# Altium PCB msp430_v4.2_name.PcbDoc (part 2 of 2)
Units mil, origin at the board's own origin, x right, y up, seen from the top; angles counter-clockwise.
Board outline 6102.36 x 4921.26 mil, 2 copper layers (Top Layer, Bottom Layer); 157 components, 141 nets, 553 pads, 72 vias.
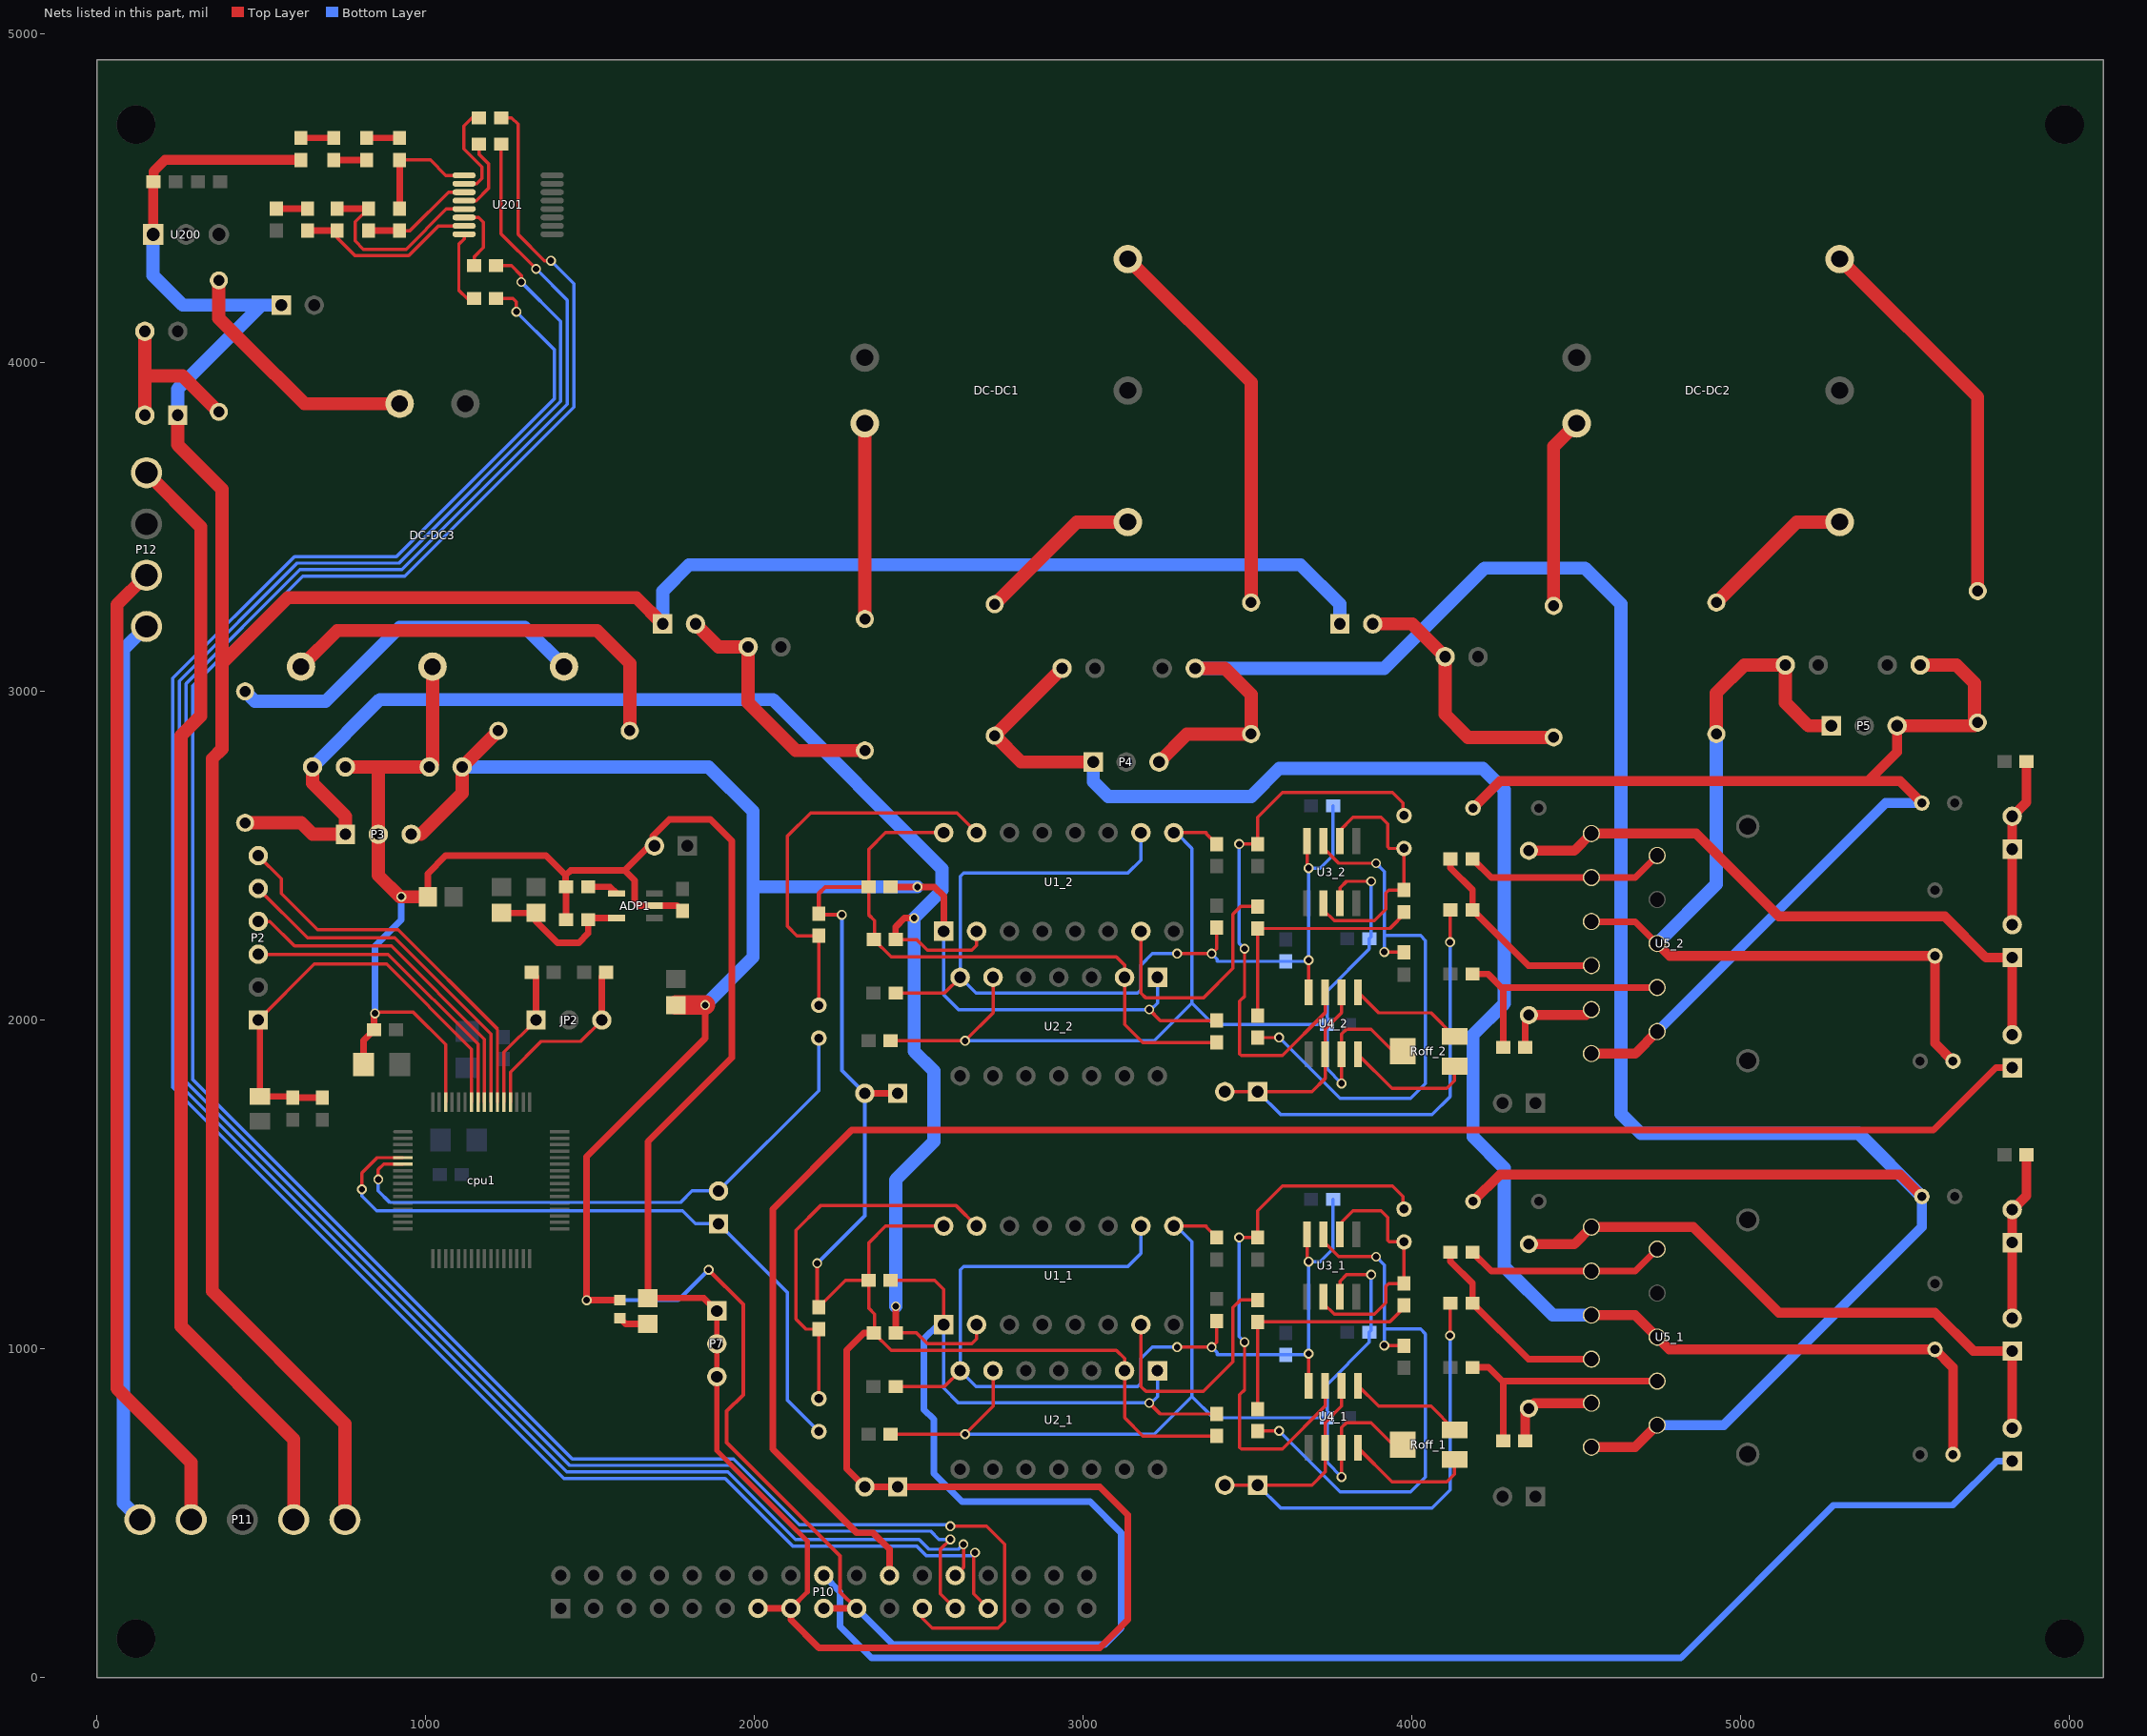
[diagram p2: the nets of this part, all layers, seen from the top]

## Via types
v1: diameter 30, hole 20, Top Layer to Bottom Layer, 71 vias
v2: diameter 50, hole 30, Top Layer to Bottom Layer, 1 vias

## Nets (pads, with @x,y where several pads share a name; then routed paths per layer and width w, separated by ;. In a path a pad name is that pad's centre, name@x,y a point inside that pad or via, vN(x,y) a via of type N, cw(c..) or ccw(c..) an arc to the next point about the centre after c; other vN are vias at no path point) (continued)
GNDB: ADP1.2 C1.2 C2.2 C3.2 C12.1 C13.1 C16_1.2 C16_2.2 cpu1.62 CT3_1.2 CT3_2.2 CT4_1.1 CT4_2.1 DC-DC3.4 DS2.2 P1_1.1 P1_1.2 P1_2.1 P1_2.2 P2.2@1695,2530 P3.2 P7.1 P7.2 P7.3 P10.13 P10.15 P_C8.2 P_C9.1 R5.2 Rf_1.1 Rf_2.1 U1_1.16 U1_2.16 U2_1.2 U2_2.2 | length 14736.5
  Top Layer w10: v1@841.54,2023.46 961.54,2023.46 1059.92,1925.08 cpu1.62@1059.92,1750.55 ; Rf_1.1@2195,1126.54 2276.54,1208.07 CT3_1.2@2346.54,1208.07 ; CT4_1.1@2362.22,1048.07 2415.29,995 3100,995 3125,970 U2_1.2@3125,933.07 3125,790 3180.39,734.61 C16_1.2@3405,734.61 ; CT4_2.1@2362.22,2245 2415.29,2191.93 3100,2191.93 3125,2166.93 U2_2.2@3125,2130 3125,1986.93 3180.39,1931.54 C16_2.2@3405,1931.54 ; CT4_1.1@2365,1050.85 2365,1105 2346.54,1123.46 CT3_1.2@2346.54,1208.07 ; CT4_2.1@2365,2247.78 2365,2301.93 2346.54,2320.39 CT3_2.2@2346.54,2405 2346.54,2518.46 2398.07,2570 U1_2.16@2575,2570 ; U1_1.16@2575,1373.07 2398.07,1373.07 2346.54,1321.54 CT3_1.2@2346.54,1208.07
  Top Layer w12: Rf_1.1@2190,1131.54 v1(2190,1260) ; Rf_2.1@2195,2323.46 2195,2385 2215,2405 CT3_2.2@2346.54,2405 ; Rf_2.1@2198.46,2320 v1(2265,2320)
  Top Layer w15: P7.1@1885,1115 P7.2@1885,1015 P7.3@1885,915 1885,690 2160,415 2160,260 P10.15@2110,210
  Top Layer w20: C12.1@809.88,1865 809.88,1938.35 C13.1@841.54,1970 v1@841.54,2023.46 ; R5.2@1005.63,2375 1005.63,2445.63 1060,2500 1365.2,2500 1425,2440.2 ; C3.2@1425,2406.73 1425,2440.2 ; C2.2@1426.54,2305.2 C3.2@1426.54,2405.2 ; C1.2@1764.13,2347.6 ADP1.2@1695,2347.6 1647.6,2347.6 1635,2360.2 1635,2425.2 1605,2455.2 ; P7.1@1885,1115 1845.63,1154.37 DS2.2@1675,1154.37 1675,1630 1930,1885 1930,2545 1865,2610 1740,2610 1690,2560 1690,2530 1679.8,2530 1605,2455.2 ; P10.13@2010,210 P10.15@2110,210 2110,175 2195,90 3050,90 3135,175 3135,495 3050,580 P1_1.1@2435,580 P1_1.2@2335,580 2280,635 2280,995.54 2332.53,1048.07 CT4_1.1@2362.22,1048.07 ; P1_2.2@2335,1776.93 P1_2.1@2435,1776.93 ; 1425,2440.2 1440,2455.2 1605,2455.2
  Top Layer w40: P_C9.1@755,2770 855,2770 ; R5.2@1005.63,2375 v1(925,2375) 920,2375 855,2440 P3.2@855,2565 855,2770 ; P_C8.2@1010,2770 855,2770 ; P_C8.2@1020,2780 DC-DC3.4@1020,3075
  Bottom Layer w12: v1(2190,1260) 2335,1405 P1_2.2@2335,1776.93 2265,1846.93 v1(2265,2320)
  Bottom Layer w20: v1(845,2020) 845,2225 925,2305 v1(925,2375)
IN1: R205.1 R208.2 U201.1 | length 363.7
  Top Layer w10: R205.1@920,4616.54 1013.46,4616.54 1060.43,4569.57 U201.1@1116.14,4569.57
  Top Layer w20: R208.2@920,4468.46 R205.1@920,4616.54
IN2: R208.1 R209.2 U201.3 | length 339.5
  Top Layer w10: R208.1@920,4401.54 951.54,4401.54 1068.39,4518.39 U201.3@1116.14,4518.39
  Top Layer w20: R209.2@825,4401.54 R208.1@920,4401.54
IN3: R209.1 R210.2 U201.5 | length 602.1
  Top Layer w10: R209.1@825,4468.46 785,4428.46 785,4370 810,4345 940,4345 1062.2,4467.2 U201.5@1116.14,4467.2
  Top Layer w20: R210.2@730,4468.46 R209.1@825,4468.46
IN4: R210.1 R211.2 U201.7 | length 557.3
  Top Layer w10: R210.1@730,4401.54 730,4380 784,4326 947.87,4326 1037.89,4416.02 U201.7@1116.14,4416.02
  Top Layer w20: R211.2@640,4401.54 R210.1@730,4401.54
IN_+12V: C200.2 FUSE.1 P1.1 P11.5 P_F1.1 P_F3.1 R200.2 U200.1 | length 9002.4
  Top Layer w30: U200.1@170,4390 170,4548.46 C200.2@171.54,4550 171.54,4581.54 206.54,4616.54 R200.2@620,4616.54
  Top Layer w40: P_F3.1@245,3840 245,3750 380,3615 380,3085 ; P11.5@753.62,480 753.62,771.38 350,1175 350,2795 380,2825 380,3085 ; P_F1.1@1720,3205 1640,3285 580,3285 380,3085
  Bottom Layer w40: U200.1@170,4390 170,4265 260,4175 500,4175 ; P_F3.1@245,3840 245,3920 500,4175 ; P1.1@560,4175 500,4175 ; P_F1.1@1720,3205 1720,3305 1800,3385 3660,3385 3780,3265 FUSE.1@3780,3205
LED_HIGH: P10.27 R207.2 | length 6390.1
  Top Layer w10: R207.2@1213.46,4195 1265,4195 1275,4185 v1(1275,4155) ; v1(2670,380) 2665.47,375.47 2665.47,254.53 P10.27@2710,210
  Bottom Layer w10: v1(1275,4155) 1390,4040 1390,3889.85 910.15,3410 600.15,3410 230,3039.85 230,1795 1420,605 1910.15,605 2115.15,400 2491.72,400 2521.72,370 2660,370 v1(2670,380)
LED_LOW: P10.23 R203.2 | length 7300.9
  Top Layer w10: R203.2@1228.46,4745 1260,4745 1280,4725 1280,4390 1360,4310 v1(1380,4310) ; P10.23@2510,210 2510,180 2540,150 2740,150 2760,170 2760,405 2705,460 v1(2595,460)
  Bottom Layer w10: v1(1380,4310) 1450,4240 1450,3865 935,3350 625,3350 290,3015 290,1820 1445,665 1935,665 2135,465 2590,465 v1(2595,460)
LED_MEDIUM: P10.26 R206.2 | length 6344.3
  Top Layer w10: R206.2@1213.46,4295 1260,4295 1290,4265 v1(1290,4245) ; P10.26@2610,310 2635,335 v1(2635,405)
  Bottom Layer w10: v1(1290,4245) 1410,4125 1410,3881.57 918.43,3390 608.43,3390 250,3031.57 250,1803.43 1428.43,625 1918.43,625 2123.43,420 2500,420 2530,390 2620,390 v1(2635,405)
LED_MEDIUMLOW: P10.25 R204.2 | length 6741.4
  Top Layer w10: R204.2@1228.46,4665 1228.46,4391.54 v1(1335,4285) ; v1(2595,420) 2565,390 2565,255 P10.25@2610,210
  Bottom Layer w10: v1(1335,4285) 1430,4190 1430,3873.28 926.72,3370 616.72,3370 270,3023.28 270,1811.72 1436.72,645 1926.72,645 2126.72,445 2535,445 2560,420 v1(2595,420)
LI_12V: P11.4 P12.1 | length 3420.2
  Top Layer w40: P12.1@150,3665 315,3500 315,2925 255,2865 255,1067.72 597.72,725 P11.4@597.72,480
LI_CRG+: P11.2 P12.3 | length 3004
  Top Layer w40: P12.3@150,3353.19 60,3263.19 60,880 285.91,654.09 P11.2@285.91,480
LI_CRG-: P11.1 P12.4 | length 2767
  Bottom Layer w40: P11.1@130,480 80,530 80,3127.28 P12.4@150,3197.28
NetADP1_4: ADP1.4 C3.1 | length 94.9
  Top Layer w20: C3.1@1493.46,2405.2 1559.8,2405.2 ADP1.4@1580,2385
NetADP1_5: ADP1.5 C2.1 R3.2 R4.2 | length 450.8
  Top Layer w20: R3.2@1230,2325.63 R4.2@1335,2325.63 1335,2300 1399.8,2235.2 1465,2235.2 1493.46,2263.66 C2.1@1493.46,2305.2 ; C2.1@1498.46,2310.2 ADP1.5@1580,2310.2
NetC2_singleCH1_1: C2_1.1 R3_1.2 R4_1.1 | length 732.7
  Top Layer w10: R4_1.1@3530,816.54 R3_1.2@3530,1081.54 3931.93,1081.54 C2_1.1@3978.46,1128.07
NetC2_singleCH1_2: C2_1.2 C3_1.1 U3_1.2 U3_1.6 | length 798.4
  Top Layer w10: U3_1.6@3730,1158.58 3730,1137.6 3762.6,1105 3885,1105 3920,1140 3920,1190 3928.46,1198.46 C2_1.2@3975,1198.46 C3_1.1@3975,1325 3930,1325 3925,1330 3925,1400 3905,1420 3820,1420 3780,1380 U3_1.2@3780,1347.56
NetC2_singleCH2_1: C2_2.1 R3_2.2 R4_2.1 | length 732.7
  Top Layer w10: R4_2.1@3530,2013.46 R3_2.2@3530,2278.46 3931.93,2278.46 C2_2.1@3978.46,2325
NetC2_singleCH2_2: C2_2.2 C3_2.1 U3_2.2 U3_2.6 | length 798.4
  Top Layer w10: U3_2.6@3730,2355.51 3730,2334.53 3762.6,2301.93 3885,2301.93 3920,2336.93 3920,2386.93 3928.46,2395.39 C2_2.2@3975,2395.39 C3_2.1@3975,2521.93 3930,2521.93 3925,2526.93 3925,2596.93 3905,2616.93 3820,2616.93 3780,2576.93 U3_2.2@3780,2544.49
NetC3_singleCH1_2: C3_1.2 R6_1.2 U4_1.3 | length 1706.7
  Top Layer w10: v1(3473.46,1338.46) R6_1.2@3530,1338.46 3530,1420 3605,1495 3940,1495 3971.93,1463.07 3971.93,1425 3975,1428.07 C3_1.2@3985,1428.07 ; v1(3490,1020) 3490,875 3475,860 3475,700 3480,695 3605,695 3735,825 U4_1.3@3735,887.56
  Bottom Layer w10: v1(3473.46,1338.46) 3473.46,1036.54 v1(3490,1020)
NetC3_singleCH2_2: C3_2.2 R6_2.2 U4_2.3 | length 1706.7
  Top Layer w10: v1(3473.46,2535.39) R6_2.2@3530,2535.39 3530,2616.93 3605,2691.93 3940,2691.93 3971.93,2660 3971.93,2621.93 3975,2625 C3_2.2@3985,2625 ; v1(3490,2216.93) 3490,2071.93 3475,2056.93 3475,1896.93 3480,1891.93 3605,1891.93 3735,2021.93 U4_2.3@3735,2084.49
  Bottom Layer w10: v1(3473.46,2535.39) 3473.46,2233.46 v1(3490,2216.93)
NetC5_2: C5.2 cpu1.53 JP2.1 | length 421.5
  Top Layer w10: cpu1.53@1237.09,1750.55 1237.09,1902.09 JP2.1@1335,2000
  Top Layer w20: JP2.1@1335,2000 C5.2@1335,2131.54
NetC5_singleCH1_1: C5_1.1 R4_1.2 U3_1.3 | length 1712.9
  Top Layer w10: R4_1.2@3530,749.61 3594.61,749.61 v1(3595,750) ; U3_1.3@3730,1347.56 3730,1326.58 3776.58,1280 v1(3890,1280) ; v1(3915,1010) 3973.46,1010 C5_1.1@3975,1008.46
  Bottom Layer w10: v1(3595,750) 3780,565 3995,565 4040,610 4040,1045 4025,1060 3915,1060 ; v1(3890,1280) 3915,1255 3915,1060 ; v1(3915,1010) 3915,1060
NetC5_singleCH2_1: C5_2.1 R4_2.2 U3_2.3 | length 1712.9
  Top Layer w10: R4_2.2@3530,1946.54 3594.61,1946.54 v1(3595,1946.93) ; U3_2.3@3730,2544.49 3730,2523.51 3776.58,2476.93 v1(3890,2476.93) ; v1(3915,2206.93) 3973.46,2206.93 C5_2.1@3975,2205.39
  Bottom Layer w10: v1(3595,1946.93) 3780,1761.93 3995,1761.93 4040,1806.93 4040,2241.93 4025,2256.93 3915,2256.93 ; v1(3890,2476.93) 3915,2451.93 3915,2256.93 ; v1(3915,2206.93) 3915,2256.93
NetC6_2: C6.2 cpu1.52 JP2.3 | length 566.5
  Top Layer w10: cpu1.52@1256.77,1750.55 1256.77,1841.77 1350,1935 1470,1935 JP2.3@1535,2000
  Top Layer w20: JP2.3@1535,2000 C6.2@1535,2131.54
NetCf_singleCH1_2: Cf_1.2 Rf_1.2 U1_1.15 | length 1170.8
  Top Layer w10: Cf_1.2@2195,848.07 Rf_1.2@2195,1059.61 2155.39,1059.61 2125,1090 2125,1360 2200,1435 2613.07,1435 U1_1.15@2675,1373.07
NetCf_singleCH2_2: Cf_2.2 Rf_2.2 U1_2.15 | length 1222.2
  Top Layer w10: Cf_2.2@2195,2045 Rf_2.2@2195,2256.54 2128.46,2256.54 2100,2285 2100,2560 2170,2630 2615,2630 U1_2.15@2675,2570
NetDC-DC1_2: DC-DC1.2 P_L1.2 | length 595
  Top Layer w40: P_L1.2@2335,3220 DC-DC1.2@2335,3815
NetDC-DC1_3: DC-DC1.3 P_L3.1 | length 1200.3
  Top Layer w40: DC-DC1.3@3135,4315 3510,3940 P_L3.1@3510,3270
NetDC-DC1_5: DC-DC1.5 P_L2.1 | length 508.6
  Top Layer w40: P_L2.1@2730,3265 2980,3515 DC-DC1.5@3135,3515
NetDC-DC2_2: DC-DC2.2 P_L4.2 | length 584
  Top Layer w40: P_L4.2@4430,3260 4430,3745 DC-DC2.2@4500,3815
NetDC-DC2_3: DC-DC2.3 P_L6.1 | length 1184
  Top Layer w40: DC-DC2.3@5300,4315 5720,3895 P_L6.1@5720,3305
NetDC-DC2_5: DC-DC2.5 P_L5.1 | length 476.5
  Top Layer w40: P_L5.1@4925,3270 5170,3515 DC-DC2.5@5300,3515
NetDC-DC3_1: DC-DC3.1 P_L7.2 | length 772.7
  Top Layer w40: P_L7.2@370,4250 370,4135 455,4050 630,3875 DC-DC3.1@920,3875
NetDC-DC3_3: DC-DC3.3 P_L9.1 | length 1125.3
  Bottom Layer w40: P_L9.1@450,3000 480,2970 695,2970 920,3195 1300,3195 DC-DC3.3@1420,3075
NetDC-DC3_5: DC-DC3.5 P_L8.1 | length 1292
  Top Layer w40: DC-DC3.5@620,3075 730,3185 1520,3185 1620,3085 P_L8.1@1620,2880
NetISO124_singleCH1_7: R3_1.1 U1_1.7 | length 761.3
  Top Layer w10: U1_1.7@3175,1073.07 3175,885 3190,870 3365,870 3455,960 3455,1125 3478.46,1148.46 R3_1.1@3530,1148.46
NetISO124_singleCH2_7: R3_2.1 U1_2.7 | length 761.3
  Top Layer w10: U1_2.7@3175,2270 3175,2081.93 3190,2066.93 3365,2066.93 3455,2156.93 3455,2321.93 3478.46,2345.39 R3_2.1@3530,2345.39
NetJumper1_singleCH1_1: P5_1.1 P6_1.2 Rg1_1.2 U5_1.1 | length 1882.6
  Top Layer w30: Rg1_1.2@4355,1318.07 4493.07,1318.07 U5_1.1@4545,1370 4855,1370 5115,1110 5590,1110 5706.93,993.07 P5_1.1@5825,993.07 P6_1.2@5825,758.07
NetJumper1_singleCH1_2: P4_1.1 P4_1.2 P5_1.2 R1_1.1 | length 514.9
  Top Layer w30: P5_1.2@5825,1093.07 P4_1.1@5825,1323.07 P4_1.2@5825,1423.07 5868.46,1466.54 R1_1.1@5868.46,1590
NetJumper1_singleCH2_1: P5_2.1 P6_2.2 Rg1_2.2 U5_2.1 | length 2200.9
  Top Layer w20: U5_2.1@4545,2566.93 4863.07,2566.93
  Top Layer w30: Rg1_2.2@4355,2515 4493.07,2515 U5_2.1@4545,2566.93 ; U5_2.1@4545,2567.33 4862.67,2567.33 4863.07,2566.93 5115,2315 5620,2315 5745,2190 P5_2.1@5825,2190 P6_2.2@5825,1955
NetJumper1_singleCH2_2: P4_2.1 P4_2.2 P5_2.2 R1_2.1 | length 514.9
  Top Layer w30: P5_2.2@5825,2290 P4_2.1@5825,2520 P4_2.2@5825,2620 5868.46,2663.46 R1_2.1@5868.46,2786.93
NetLED10_1: DS2.1 R60.1 | length 92
  Top Layer w20: R60.1@1590,1092.44 1606.81,1075.63 DS2.1@1675,1075.63
NetOP27_singleCH1_1: Roff_1.CCW U4_1.1 | length 349.3
  Top Layer w10: U4_1.1@3835,887.56 3897.56,825 4057.09,825 Roff_1.CCW@4128.74,753.35
NetOP27_singleCH1_2: P2_1.1 P2_1.2 R5_1.1 U4_1.2 U4_1.6 | length 1810.3
  Top Layer w10: P2_1.2@3430,585 P2_1.1@3530,585 3695,585 3735,625 U4_1.6@3735,698.58 3735,775 3785,825 U4_1.2@3785,887.56 ; v1(4115,1040) 4115,1136.54 R5_1.1@4116.54,1138.07
  Bottom Layer w10: P2_1.1@3530,585 3600,515 4060,515 4115,570 v1(4115,1040)
NetOP27_singleCH1_8: Roff_1.CW U4_1.8 | length 390.5
  Top Layer w10: U4_1.8@3835,698.58 3938.58,595 4105,595 4128.74,618.74 Roff_1.CW@4128.74,662.8
NetOP27_singleCH2_1: Roff_2.CCW U4_2.1 | length 349.3
  Top Layer w10: U4_2.1@3835,2084.49 3897.56,2021.93 4057.09,2021.93 Roff_2.CCW@4128.74,1950.28
NetOP27_singleCH2_2: P2_2.1 P2_2.2 R5_2.1 U4_2.2 U4_2.6 | length 1810.3
  Top Layer w10: P2_2.2@3430,1781.93 P2_2.1@3530,1781.93 3695,1781.93 3735,1821.93 U4_2.6@3735,1895.51 3735,1971.93 3785,2021.93 U4_2.2@3785,2084.49 ; v1(4115,2236.93) 4115,2333.46 R5_2.1@4116.54,2335
  Bottom Layer w10: P2_2.1@3530,1781.93 3600,1711.93 4060,1711.93 4115,1766.93 v1(4115,2236.93)
NetOP27_singleCH2_8: Roff_2.CW U4_2.8 | length 390.5
  Top Layer w10: U4_2.8@3835,1895.51 3938.58,1791.93 4105,1791.93 4128.74,1815.67 Roff_2.CW@4128.74,1859.72
NetOPA2544_singleCH1_2: R7_1.2 U5_1.2 U5_1.3 | length 612.9
  Top Layer w20: R7_1.2@4183.46,1293.07 4240.44,1236.1 U5_1.3@4545,1236.1 4678,1236.1 U5_1.2@4745,1303.1
NetOPA2544_singleCH1_7: R5_1.2 R7_1.1 U5_1.7 | length 614.5
  Top Layer w20: R7_1.1@4116.54,1293.07 4116.54,1265.39 4183.46,1198.46 R5_1.2@4183.46,1138.07 4353.14,968.4 U5_1.7@4545,968.4
NetOPA2544_singleCH1_8: R2_1.2 R8_1.2 U5_1.8 | length 761.5
  Top Layer w20: R2_1.2@4183.46,943.07 4231.93,943.07 4273.5,901.5 ; R8_1.2@4276.54,720 4276.54,898.46 4273.5,901.5 ; U5_1.8@4745,901.5 4273.5,901.5
NetOPA2544_singleCH1_9: R8_1.1 Rg1_1.1 U5_1.9 | length 299.7
  Top Layer w20: Rg1_1.1@4343.46,806.54 Rg1_1.1@4355,818.07
  Top Layer w30: R8_1.1@4343.46,720 Rg1_1.1@4343.46,806.54 ; Rg1_1.1@4355,818.07 4371.53,834.6 U5_1.9@4545,834.6
NetOPA2544_singleCH2_2: R7_2.2 U5_2.2 U5_2.3 | length 612.9
  Top Layer w20: R7_2.2@4183.46,2490 4240.44,2433.03 4545,2433.03 4678,2433.03 U5_2.2@4745,2500.03
NetOPA2544_singleCH2_7: R5_2.2 R7_2.1 U5_2.7 | length 614.5
  Top Layer w20: R7_2.1@4116.54,2490 4116.54,2462.32 4183.46,2395.39 R5_2.2@4183.46,2335 4353.14,2165.33 U5_2.7@4545,2165.33
NetOPA2544_singleCH2_8: R2_2.2 R8_2.2 U5_2.8 | length 1198.8
  Top Layer w20: R2_2.2@4183.46,2140 4230,2140 4271.17,2098.83 ; R8_2.2@4271.17,1922.29 R8_2.2@4276.54,1916.93 4276.54,2093.46 4271.17,2098.83 ; 4316.5,2098.43 U5_2.8@4745,2098.43 ; U5_2.8@4745,2098.83 4271.17,2098.83
NetOPA2544_singleCH2_9: R8_2.1 Rg1_2.1 U5_2.9 | length 299.9
  Top Layer w20: R8_2.1@4343.46,1916.93 4343.46,2003.46 Rg1_2.1@4355,2015
  Top Layer w30: Rg1_2.1@4355,2015 4528.07,2015 U5_2.9@4545,2031.93
NetP_C1_1: P_C1.1 P_F1.2 P_L1.1 | length 774.1
  Top Layer w40: P_F1.2@1820,3205 1890,3135 P_C1.1@1980,3135 1980,2965 2125,2820 P_L1.1@2335,2820
NetP_C4_1: FUSE.2 P_C4.1 P_L4.1 | length 795.4
  Top Layer w40: FUSE.2@3880,3205 4000,3205 P_C4.1@4100,3105 4100,2930 4170,2860 P_L4.1@4430,2860
NetP_C7_1: P_C7.1 P_F3.2 P_L7.1 | length 525.6
  Top Layer w40: P_F3.2@145,3840 145,3960 ; P_C7.1@145,4095 145,3960 ; P_L7.1@370,3850 260,3960 145,3960
NetR200_1: R200.1 R201.2 | length 100
  Top Layer w20: R200.1@620,4683.46 R201.2@720,4683.46
NetR201_1: R201.1 R202.2 | length 100
  Top Layer w20: R201.1@720,4616.54 R202.2@820,4616.54
NetR202_1: R202.1 R205.2 | length 100
  Top Layer w20: R202.1@820,4683.46 R205.2@920,4683.46
NetR203_1: R203.1 U201.2 | length 300.2
  Top Layer w10: U201.2@1116.14,4543.98 1153.98,4543.98 1170,4560 1170,4595.4 1115,4650.4 1115,4720 1140,4745 R203.1@1161.54,4745
NetR204_1: R204.1 U201.4 | length 236.1
  Top Layer w10: U201.4@1116.14,4492.8 1152.8,4492.8 1190,4530 1190,4605 1161.54,4633.46 R204.1@1161.54,4665
NetR206_1: R206.1 U201.6 | length 208.5
  Top Layer w10: U201.6@1116.14,4441.61 1160,4441.61 1175,4426.61 1175,4350 1146.54,4321.54 R206.1@1146.54,4295
NetR207_1: R207.1 U201.8 | length 234
  Top Layer w10: U201.8@1116.14,4390.43 1116.14,4376.14 1100,4360 1100,4220 1125,4195 R207.1@1146.54,4195
NetR211_1: R211.1 R212.2 | length 95
  Top Layer w20: R212.2@545,4468.46 R211.1@640,4468.46
OUT1: P6_1.1 P10.18 | length 4027.8
  Bottom Layer w20: P10.18@2210,310 2260,260 2260,155 2355,60 4816.93,60 5280.96,524.04 5644.04,524.04 5778.07,658.07 P6_1.1@5825,658.07
OUT2: P6_2.1 P10.22 | length 5239.4
  Top Layer w20: P10.22@2410,310 2410,390 2360,440 2310,440 2055,695 2055,1425 2295,1665 5585,1665 5775,1855 P6_2.1@5825,1855
RST1: C4.2 cpu1.58 DS1.1 P2.1@490,2000 R1.1 | length 1407.7
  Top Layer w10: P2.1@490,2000 660,2170 880,2170 1138.66,1911.34 cpu1.58@1138.66,1750.55
  Top Layer w20: P2.1@490,2000 495,1995 DS1.1@495,1767.4 R1.1@591.06,1767.4 ; R1.1@595,1763.46 C4.2@685,1763.46
SIG_IN1: Cf_1.1 cpu1.5 P6.1 | length 2092.6
  Top Layer w10: v1(805,1485) 805,1535 851.26,1581.26 cpu1.5@930,1581.26
  Bottom Layer w10: v1(805,1485) 805,1465 850,1420 1780,1420 1820,1380 P6.1@1890,1380 2100,1170 2100,843.07 Cf_1.1@2195,748.07
SIG_IN2: Cf_2.1 cpu1.6 P6.2 | length 1802.2
  Top Layer w10: v1(855,1515) 855,1545 871.57,1561.57 cpu1.6@930,1561.57
  Bottom Layer w10: v1(855,1515) 855,1480 890,1445 1775,1445 1810,1480 P6.2@1890,1480 2195,1785 Cf_2.1@2195,1945
TCK: cpu1.57 P2.3 | length 957.7
  Top Layer w10: P2.3@490,2200 885,2200 1158.35,1926.65 cpu1.57@1158.35,1750.55
TDI: cpu1.55 P2.5 | length 1097.8
  Top Layer w10: P2.5@490,2400 640,2250 905,2250 1197.72,1957.28 cpu1.55@1197.72,1750.55
TDO: cpu1.54 P2.6 | length 1194.3
  Top Layer w10: P2.6@490,2500 560,2430 560,2385 670,2275 915,2275 1217.4,1972.6 cpu1.54@1217.4,1750.55
TMS: cpu1.56 P2.4 | length 1027.8
  Top Layer w10: P2.4@490,2300 525,2300 600,2225 895,2225 1178.03,1941.97 cpu1.56@1178.03,1750.55
VCC1: C17_1.2 C18_1.1 P4.1 P_C2.1 P_L2.2 U5_1.5 U5_1.6 | length 5299.7
  Top Layer w30: U5_1.5@4545,1102.3 4678.1,1102.3 U5_1.6@4745,1035.4 4782.33,998.07 C17_1.2@5590,998.07 5645,943.07 C18_1.1@5645,678.07
  Top Layer w40: P_C2.1@2935,3070 P_L2.2@2730,2865 2810,2785 P4.1@3030,2785
  Bottom Layer w40: P4.1@3030,2785 3030,2725 3075,2680 3510,2680 3595,2765 4215,2765 4280,2700 4280,2050 4185,1955 4185,1645 4280,1550 4280,1250 4427.7,1102.3 U5_1.5@4545,1102.3
VCC2: C17_2.2 C18_2.1 P5.1 P_C5.1 P_L5.2 U5_2.5 U5_2.6 | length 2797.6
  Top Layer w20: U5_2.5@4545,2299.23 4678.1,2299.23 4745,2232.33 U5_2.6@4745.4,2232.33
  Top Layer w30: U5_2.6@4745,2232.73 4745.4,2232.33 4782.73,2195 C17_2.2@5590,2195 5590,1930 C18_2.1@5645,1875
  Top Layer w40: P_L5.2@4925,2870 4925,2995 5010,3080 P_C5.1@5135,3080 5135,2965 5205,2895 P5.1@5275,2895
  Bottom Layer w40: U5_2.6@4745,2232.73 4925,2412.73 P_L5.2@4925,2870
VCC5V_singleCH1: C6_1.2 C9_1.2 C14_1.1 CT2_1.1 Roff_1.W U1_1.9 U2_1.6 U3_1.7 U4_1.7 | length 3530
  Top Layer w10: CT2_1.1@2413.46,740 v1(2640,740) 2725,825 U2_1.6@2725,933.07 ; U1_1.9@3275,1373.07 3373.46,1373.07 3373.46,1370 C14_1.1@3405,1338.46 ; U3_1.7@3780,1158.58 3780,1205 3800,1225 v1(3875,1225) ; v1(3785,610) U4_1.7@3785,698.58 3785,760 3800,775 3875,775 3941.93,708.07 Roff_1.W@3971.26,708.07
  Bottom Layer w10: v1(2640,740) 3215,740 3330,855 ; U1_1.9@3275,1373.07 3281.93,1373.07 3330,1325 3330,855 ; v1(3785,610) 3740.85,654.15 C6_1.2@3740.85,790 ; v1(3875,1225) 3875,1055.85 C9_1.2@3869.15,1050 3869.15,1019.15 3740.85,890.85 C6_1.2@3740.85,790 ; 3330,855 3395,790 C6_1.2@3740.85,790
VCC5V_singleCH2: C6_2.2 C9_2.2 C14_2.1 CT2_2.1 Roff_2.W U1_2.9 U2_2.6 U3_2.7 U4_2.7 | length 3530
  Top Layer w10: CT2_2.1@2413.46,1936.93 v1(2640,1936.93) 2725,2021.93 U2_2.6@2725,2130 ; U1_2.9@3275,2570 3373.46,2570 3373.46,2566.93 C14_2.1@3405,2535.39 ; U3_2.7@3780,2355.51 3780,2401.93 3800,2421.93 v1(3875,2421.93) ; v1(3785,1806.93) U4_2.7@3785,1895.51 3785,1956.93 3800,1971.93 3875,1971.93 3941.93,1905 Roff_2.W@3971.26,1905
  Bottom Layer w10: v1(2640,1936.93) 3215,1936.93 3330,2051.93 ; U1_2.9@3275,2570 3281.93,2570 3330,2521.93 3330,2051.93 ; v1(3785,1806.93) 3740.85,1851.08 C6_2.2@3740.85,1986.93 ; v1(3875,2421.93) 3875,2252.78 C9_2.2@3869.15,2246.93 3869.15,2216.08 3740.85,2087.78 C6_2.2@3740.85,1986.93 ; 3330,2051.93 3395,1986.93 C6_2.2@3740.85,1986.93
VCC_+5V: C16_1.1 C16_2.1 CT3_1.1 CT3_2.1 P3.3 P10.17 P10.19 P_C8.1 P_L8.2 R6.2 R60.2 U1_1.1 U1_2.1 U2_1.1 U2_2.1 | length 10737.8
  Top Layer w10: CT3_1.1@2413.46,1208.07 2546.93,1208.07 2575,1180 U1_1.1@2575,1073.07 ; v1(3200,835) 3233.46,801.54 C16_1.1@3405,801.54 ; v1(3200,2031.93) 3233.46,1998.46 C16_2.1@3405,1998.46
  Top Layer w12: v1(1860,1240) 1965,1135 1965,860 1915,810 1915,715 2260,370 2260,260 P10.19@2310,210
  Top Layer w20: R60.2@1590,1147.56 v1(1489.03,1147.56) 1489.03,1584.03 1849.37,1944.37 v1(1849.37,2045.63) ; P10.17@2210,210 P10.19@2310,210 ; CT3_2.1@2413.46,2405 v1(2495,2405) 2546.93,2405 2575,2376.93 U1_2.1@2575,2270
  Top Layer w40: P3.3@955,2565 985,2565 1110,2690 P_C8.1@1110,2770 P_L8.2@1220,2880
  Top Layer w60: R6.2@1760,2045.63 v1(1849.37,2045.63)
  Bottom Layer w10: U1_1.1@2575,1073.07 2575,880 2620,835 v1(3200,835) 3205,835 3225,855 U2_1.1@3225,933.07 ; U1_2.1@2575,2270 2575,2076.93 2620,2031.93 v1(3200,2031.93) 3205,2031.93 3225,2051.93 U2_2.1@3225,2130
  Bottom Layer w12: v1(1489.03,1147.56) 1767.56,1147.56 v1(1860,1240)
  Bottom Layer w20: P10.19@2310,210 2420,100 3065,100 3115,150 3115,440 3020,535 2630,535 2545,620 2545,785 2515,815 2515,1030 2558.07,1073.07 U1_1.1@2575,1073.07
  Bottom Layer w40: P_C8.1@1110,2770 1860,2770 1995,2635 1995,2405 ; v1(1849.37,2045.63) 1995,2191.26 1995,2405 ; v1(2495,2405) 1995,2405
VEE1: C4_1.2 C8_1.2 P4.3 P_C3.2 P_L3.2 U5_1.10 U5_1.11 | length 7476.6
  Top Layer w30: C8_1.2@4185,1448.07 4266.93,1530 5483.07,1530 C4_1.2@5550,1463.07 ; U5_1.11@4545,700.7 4678.1,700.7 U5_1.10@4745,767.6
  Top Layer w40: P4.3@3230,2785 3315,2870 P_L3.2@3510,2870 3510,2990 3430,3070 P_C3.2@3340,3070
  Bottom Layer w30: U5_1.10@4745,767.6 4947.6,767.6 5550,1370 C4_1.2@5550,1463.07
  Bottom Layer w40: P_C3.2@3340,3070 3915,3070 4220,3375 4525,3375 4635,3265 4635,1715 4695,1655 5358.07,1655 C4_1.2@5550,1463.07
VEE2: C4_2.2 C8_2.2 P5.3 P_C6.2 P_L6.2 U5_2.10 U5_2.11 | length 3637.5
  Top Layer w20: C8_2.2@4185,2645 4188.07,2645 4270,2726.93
  Top Layer w30: C8_2.2@4185,2645 4266.93,2726.93 4270,2726.93 5386.93,2726.93 ; U5_2.11@4545,1898.03 4678.5,1898.03 U5_2.10@4745,1964.53 ; P5.3@5475,2895 5475,2815 5386.93,2726.93 ; C4_2.2@5550,2660 5483.07,2726.93 5386.93,2726.93
  Top Layer w40: P5.3@5475,2895 P_L6.2@5710,2895 ; P_C6.2@5545,3080 5655,3080 5710,3025 P_L6.2@5710,2895 ; P_L6.2@5720,2905 P_L6.2@5710,2895
  Bottom Layer w30: U5_2.10@4745,1964.93 5440.07,2660 C4_2.2@5550,2660
VEE5V_singleCH1: C7_1.2 C13_1.2 C15_1.2 CT1_1.2 U1_1.10 U2_1.7 U3_1.4 U4_1.4 | length 3155
  Top Layer w10: CT1_1.2@2428.46,885 2576.93,885 U2_1.7@2625,933.07 ; v1(3285,1005) v1(3390,1005) 3405,1020 C15_1.2@3405,1084.61 ; U3_1.4@3680,1347.56 3680,1270 v1(3685,1265) ; U4_1.4@3685,887.56 v1(3685,985)
  Bottom Layer w10: U1_1.10@3175,1373.07 3175,1290 3135,1250 2635,1250 2625,1240 U2_1.7@2625,933.07 2673.07,885 3165,885 3175,895 3175,970 3210,1005 v1(3285,1005) ; v1(3390,1005) 3406.54,988.46 3406.54,981.54 C7_1.2@3615,981.54 3681.54,981.54 v1(3685,985) v1(3685,1265) 3720,1265 3759.15,1304.15 C13_1.2@3759.15,1455
VEE5V_singleCH2: C7_2.2 C13_2.2 C15_2.2 CT1_2.2 U1_2.10 U2_2.7 U3_2.4 U4_2.4 | length 3155
  Top Layer w10: CT1_2.2@2428.46,2081.93 2576.93,2081.93 U2_2.7@2625,2130 ; v1(3285,2201.93) v1(3390,2201.93) 3405,2216.93 C15_2.2@3405,2281.54 ; U3_2.4@3680,2544.49 3680,2466.93 v1(3685,2461.93) ; U4_2.4@3685,2084.49 v1(3685,2181.93)
  Bottom Layer w10: U1_2.10@3175,2570 3175,2486.93 3135,2446.93 2635,2446.93 2625,2436.93 U2_2.7@2625,2130 2673.07,2081.93 3165,2081.93 3175,2091.93 3175,2166.93 3210,2201.93 v1(3285,2201.93) ; v1(3390,2201.93) 3406.54,2185.39 3406.54,2178.46 C7_2.2@3615,2178.46 3681.54,2178.46 v1(3685,2181.93) v1(3685,2461.93) 3720,2461.93 3759.15,2501.08 C13_2.2@3759.15,2651.93
VEE_-5V: CT4_1.2 CT4_2.2 P3.1 P_C9.2 P_L9.2 U1_1.2 U1_2.2 | length 5025.4
  Top Layer w10: CT4_1.2@2428.46,1048.07 CT4_1.2@2429.15,1048.07 2491.93,1048.07 2525,1015 2660,1015 2675,1030 U1_1.2@2675,1073.07 ; CT4_2.2@2428.46,2245 CT4_2.2@2429.15,2245 2491.93,2245 2525,2211.93 2660,2211.93 2675,2226.93 U1_2.2@2675,2270
  Top Layer w20: CT4_2.2@2428.46,2245 2428.46,2283.46 2455,2310 v1(2485,2310) ; CT4_1.2@2429.15,1048.07 v1(2429.15,1129.15) v1@2430,1130
  Top Layer w40: P_L9.2@450,2600 620,2600 655,2565 P3.1@755,2565 755,2620 655,2720 P_C9.2@655,2770
  Bottom Layer w40: P_C9.2@655,2770 860,2975 2055,2975 2570,2460 2570,2395 v1(2485,2310) 2485,1905 2545,1845 2545,1630 2429.15,1514.15 v1(2429.15,1129.15)
pads on no net: cpu1.7 cpu1.8 cpu1.9 cpu1.10 cpu1.11 JP2.2 P10.21 P10.29 P10.30 P10.31 P10.32 P10.33 P10.34 U1_1.3 U1_1.4 U1_1.5 U1_1.6 U1_1.11 U1_1.12 U1_1.13 U1_1.14 U1_2.3 U1_2.4 U1_2.5 U1_2.6 U1_2.11 U1_2.12 U1_2.13 U1_2.14 U2_1.3 U2_1.4 U2_1.8 U2_1.9 U2_1.10 U2_1.11 U2_1.12 U2_1.13 U2_1.14 U2_2.3 U2_2.4 U2_2.8 U2_2.9 U2_2.10 U2_2.11 U2_2.12 U2_2.13 U2_2.14 U3_1.1 U3_1.5 U3_1.8 U3_2.1 U3_2.5 U3_2.8 U4_1.5 U4_2.5 U5_1. U5_1.4 U5_2. U5_2.4 U201.10 U201.15

## Polygon pours and split planes (outlines as drawn)
GNDA1 on Top Layer "Bottom Layer-No Net" (solid, remove dead copper, pour order 2): 3360,1635 6005,1635 6010,1630 6010,360 3355,360 3360,365 3360,1645
GNDA2 on Top Layer "Bottom Layer-No Net" (solid, remove dead copper, pour order 6): 3355,2805 6015,2805 6020,2810 6025,2805 6025,1685 3350,1685 3350,2810
GNDB on Top Layer "Bottom Layer-No Net" (solid, remove dead copper, pour order 10): 579.63,2825 2022.81,2825 2096.82,2745 2106.07,2735 2485.37,2735 2485.37,520 2490,515 1222.58,515 861.79,905 575,1215 575,2820
GND on Top Layer "Bottom Layer-No Net" (solid, remove dead copper, pour order 20): 1600,4100 1600,4880 1595,4885 270,4885 235,4885 230,4880 230,4710 220,4710 45,4535 25,4515 25,4115 25,4100 20,4095 1595,4095
GNDA1 on Bottom Layer "Bottom Layer-No Net" (solid, remove dead copper, pour order 4): 3360,1635 6010,1635 6010,360 3360,360 3365,365 3365,1630
GNDA2 on Bottom Layer "Bottom Layer-No Net" (solid, remove dead copper, pour order 8): 3350,2810 6025,2810 6030,2805 6030,1690 6030,1680 3365,1680 3350,1695 3345,1700 3345,2805
GNDB on Bottom Layer "Bottom Layer-No Net" (solid, remove dead copper, pour order 16): 570,2825 575,2830 2025,2830 2025,2820 2110,2735 2485,2735 2485,515 2445,475 2120,475 1275,475 575,1175 570,1180 570,2825
GND on Bottom Layer "Bottom Layer-No Net" (solid, remove dead copper, pour order 18): 1595,4110 25,4110 25,4535 30,4535 240,4745 235,4750 235,4890 1590,4890 1595,4885 1595,4110

## Keep-outs
Keep-Out Layer:
  the board outline again, w10

## Other copper
Top Layer:
  rectangle net A+3.3V: 975,1715 1025,1785
  rectangle net D+3.3V: 905,1660 955,1730
  rectangle net GND: 1350,4440 1415,4518.39

## Silkscreen, mask and mechanical layers (free items; w line width, h text height)
Top Overlay:
  lines w10: 395,2075 395,2300 ; 440,1840 540,1840 640,1840 ; 440,1845 440,1945 ; 545,2550 645,2550 ; 640,1830 640,2545
  text "Control & Stimulation" at 1770,4695 h60
  text "MENB-II-C v1.0 2015.3.3" at 2895,4685 h60
  text "BY SHENQIAO" at 1950,4560 h60
  text "IN_+12V" at 470,4240 h30
  text "GND" at 640,4085 h30
  text "12V_Li" at 360,3650 h30
  text "GND" at 375,3490 h30
  text "Li_CRG+" at 290,3335 h30
  text "Li_CRG-" at 295,3190 h30
  text "GND" at 1540,2525 h30
  text "5V" at 1865,2500 h30
  text "1:Li_CRG-" at 111,1256 h50
  text "2:Li_CRG+" at 111,1169 h50
  text "3:GND" at 111,1082 h50
  text "+" at 1725,1005 h30
  text "4:12V_Li" at 111,1000 h50
  text "5:IN_+12V" at 111,913 h50
  text "1" at 115,720 h60
  text "2" at 271.25,720 h60
  text "3" at 427.5,720 h60
  text "4" at 583.75,720 h60
  text "5" at 740,720 h60

## Text inside footprints (layer, text, board x,y; h text height)
P10: Top Overlay "2" at 1260,290 h50; Top Overlay "1" at 1275,185 h50; Top Overlay "33" at 3085,190 h50; Top Overlay "34" at 3080,295 h50